# Altium PCB OmniSensor.PcbDoc
Units mm, origin at the board's own origin, x right, y up, seen from the top; angles counter-clockwise.
Board outline 70.1 x 50.04 mm, 4 copper layers (Top Layer, GND, PWR, Bottom Layer), stack 1.56 mm thick; 27 components, 11 nets, 95 pads, 19 vias.
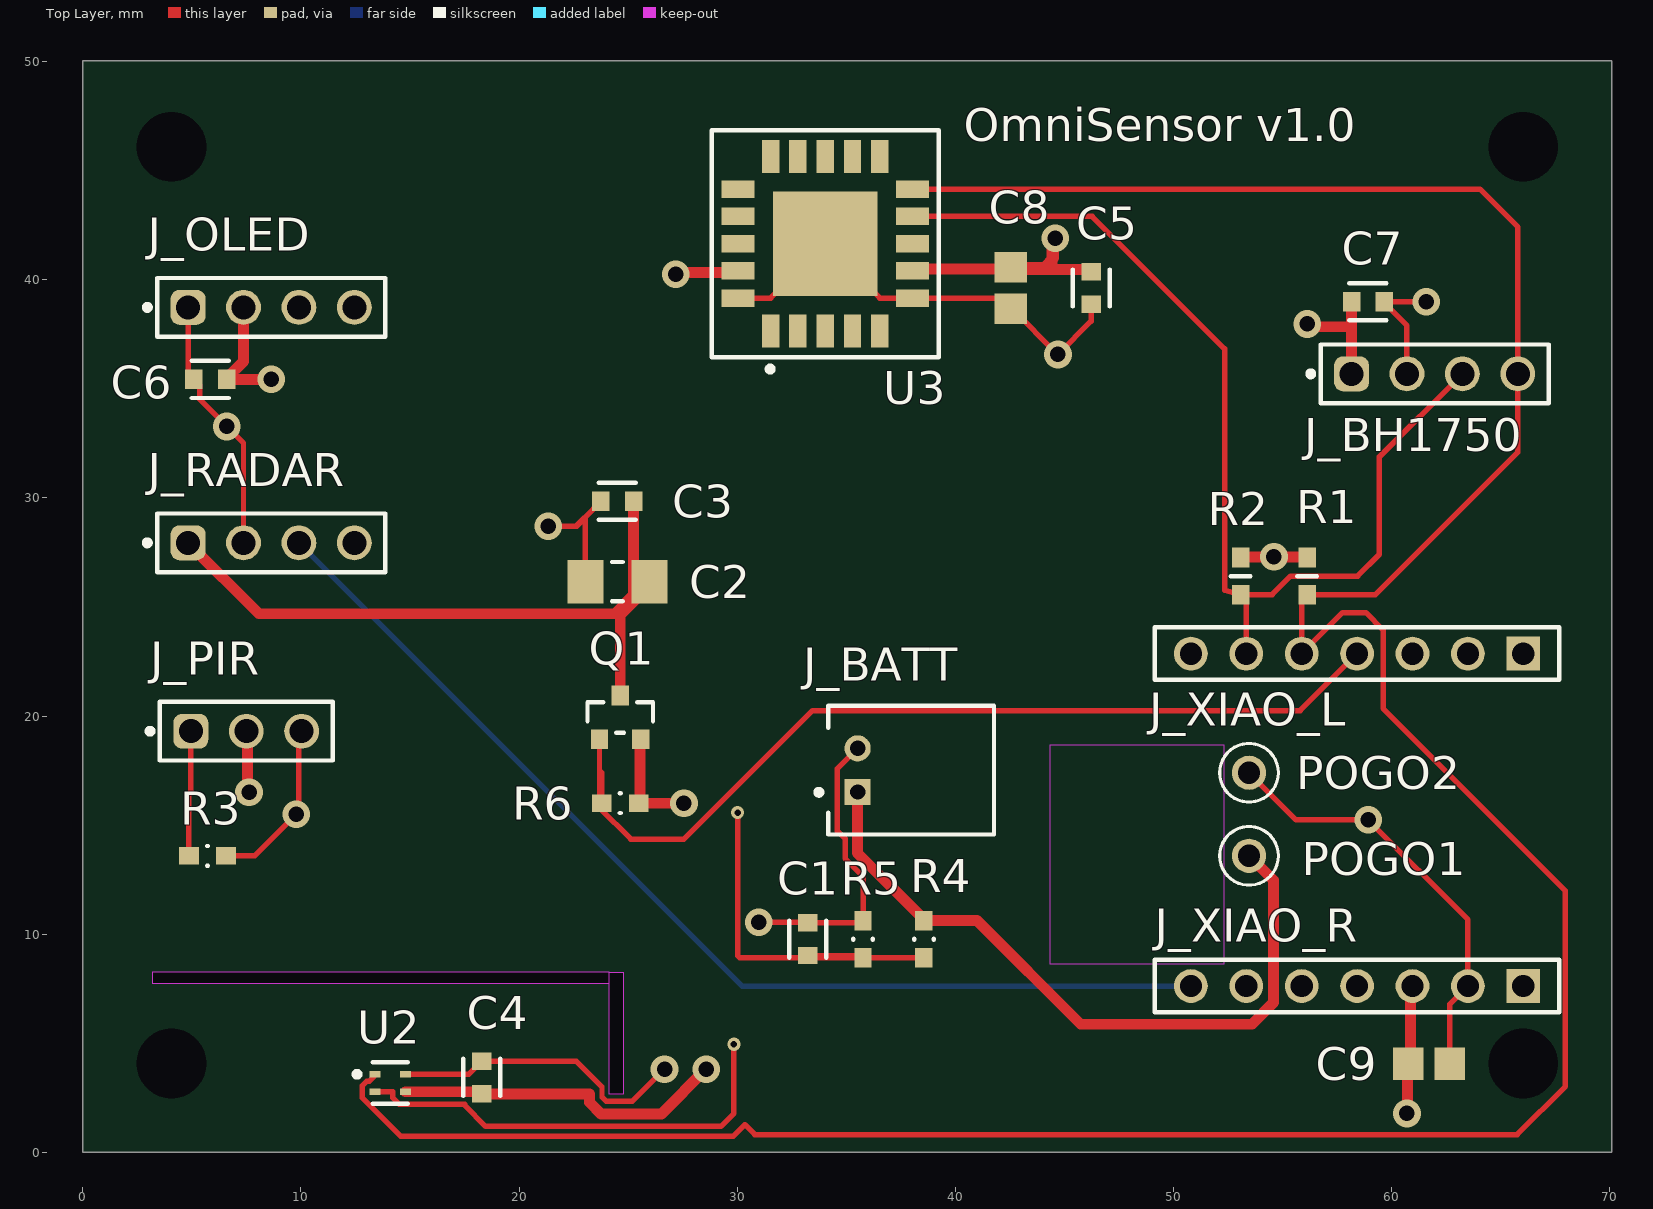
[diagram p0: Top Layer view]
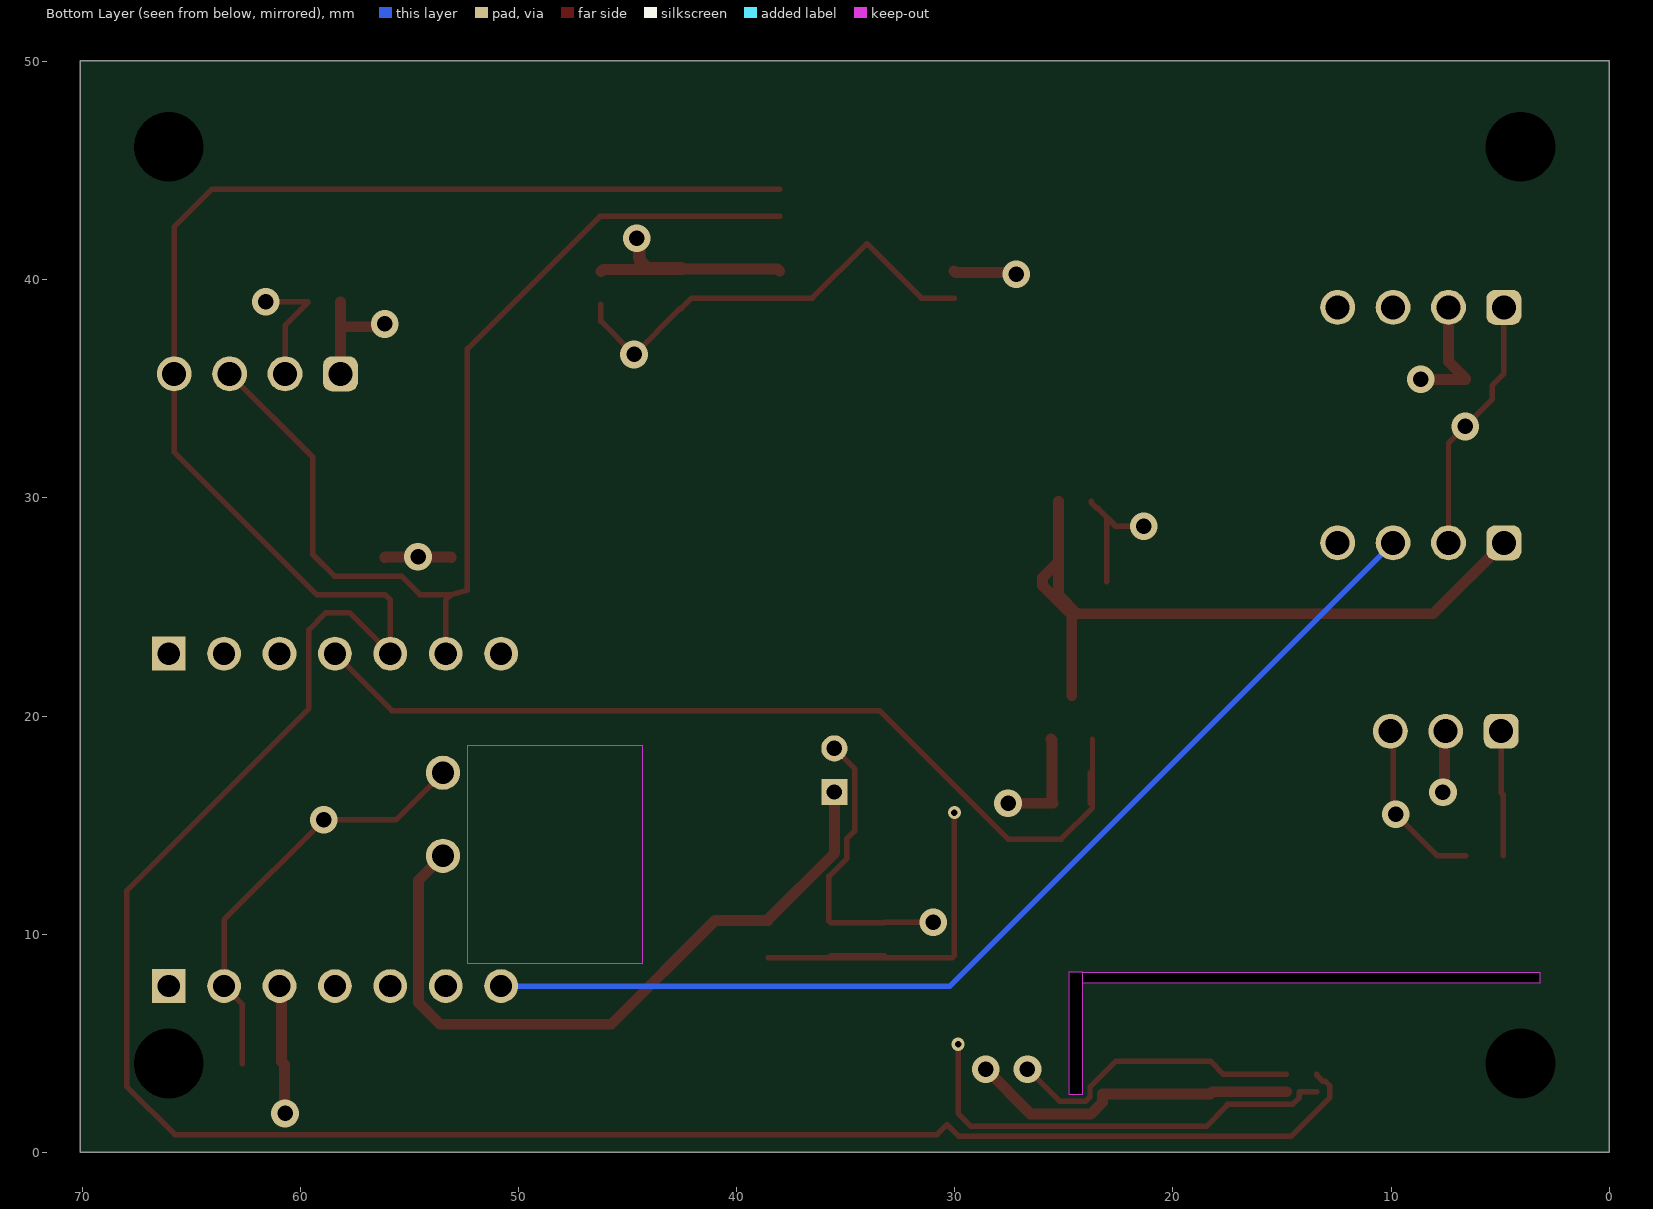
[diagram p1: Bottom Layer view, seen from below]
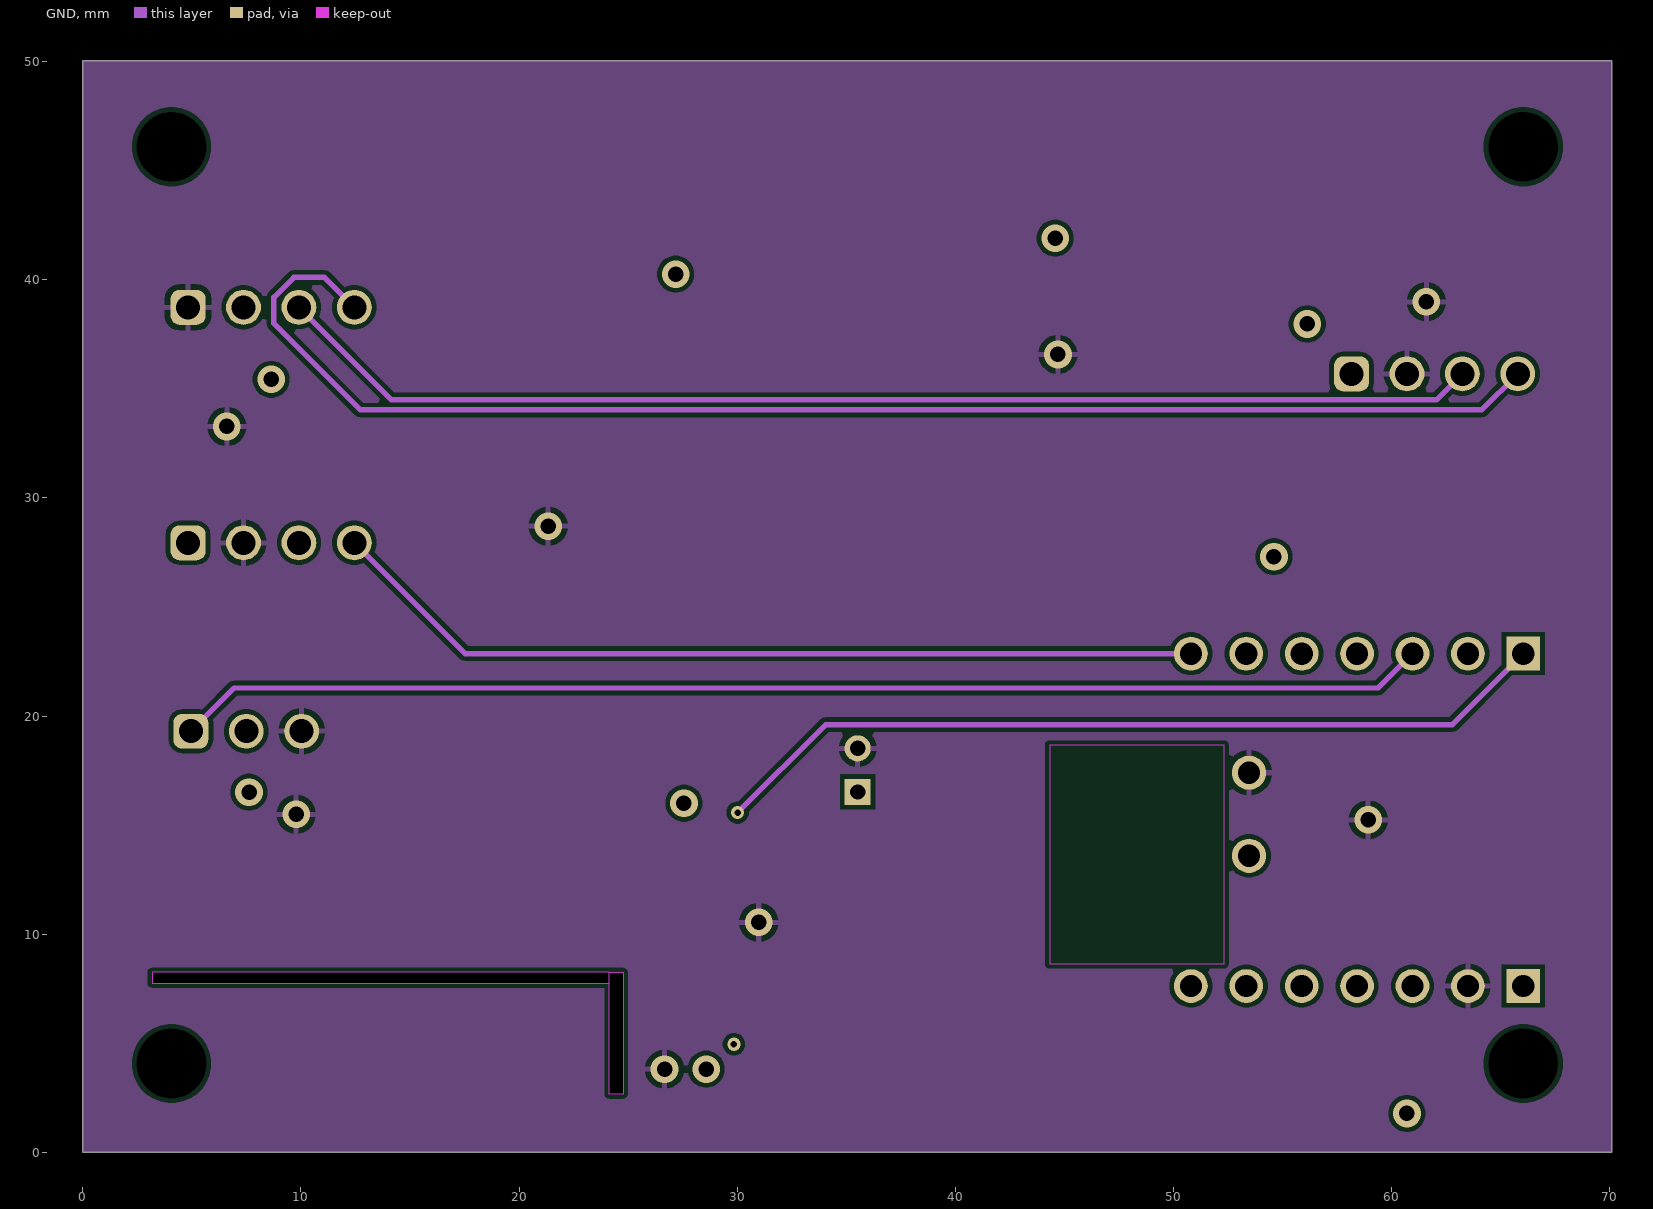
[diagram p2: GND]
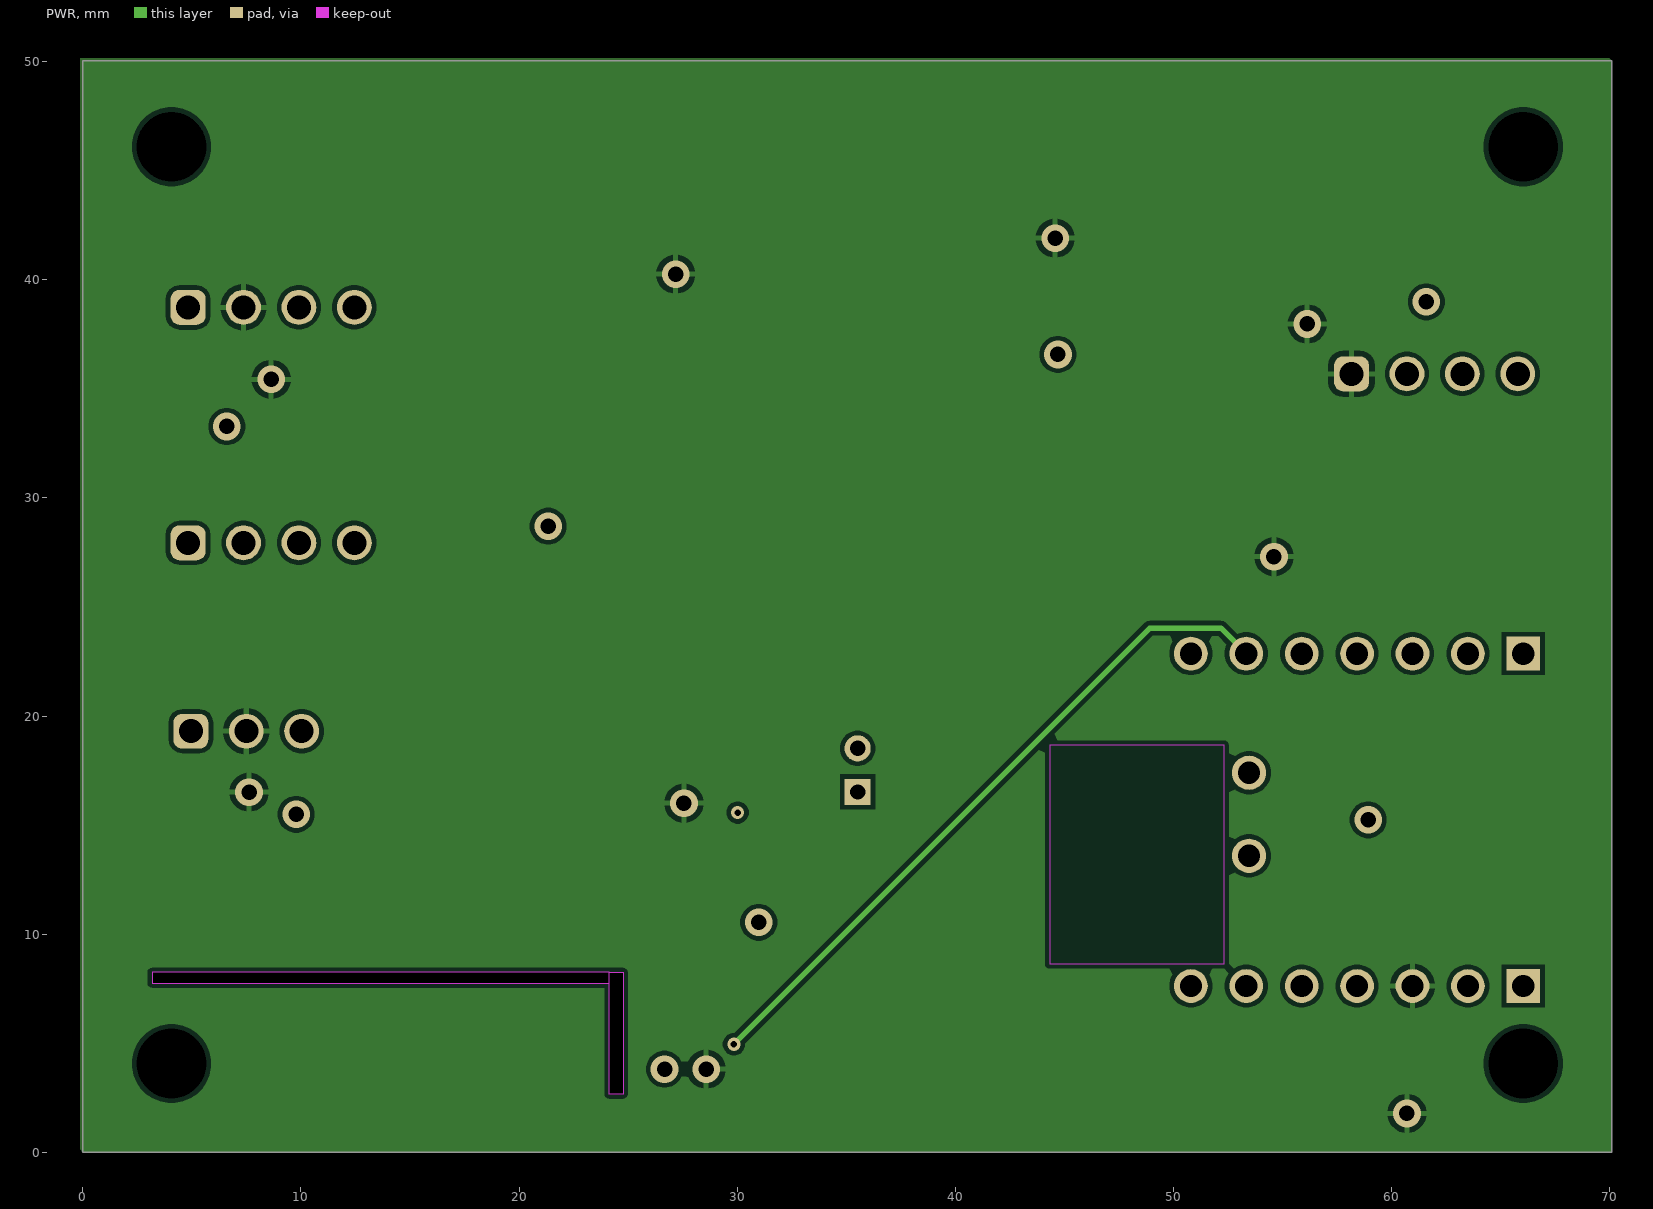
[diagram p3: PWR]
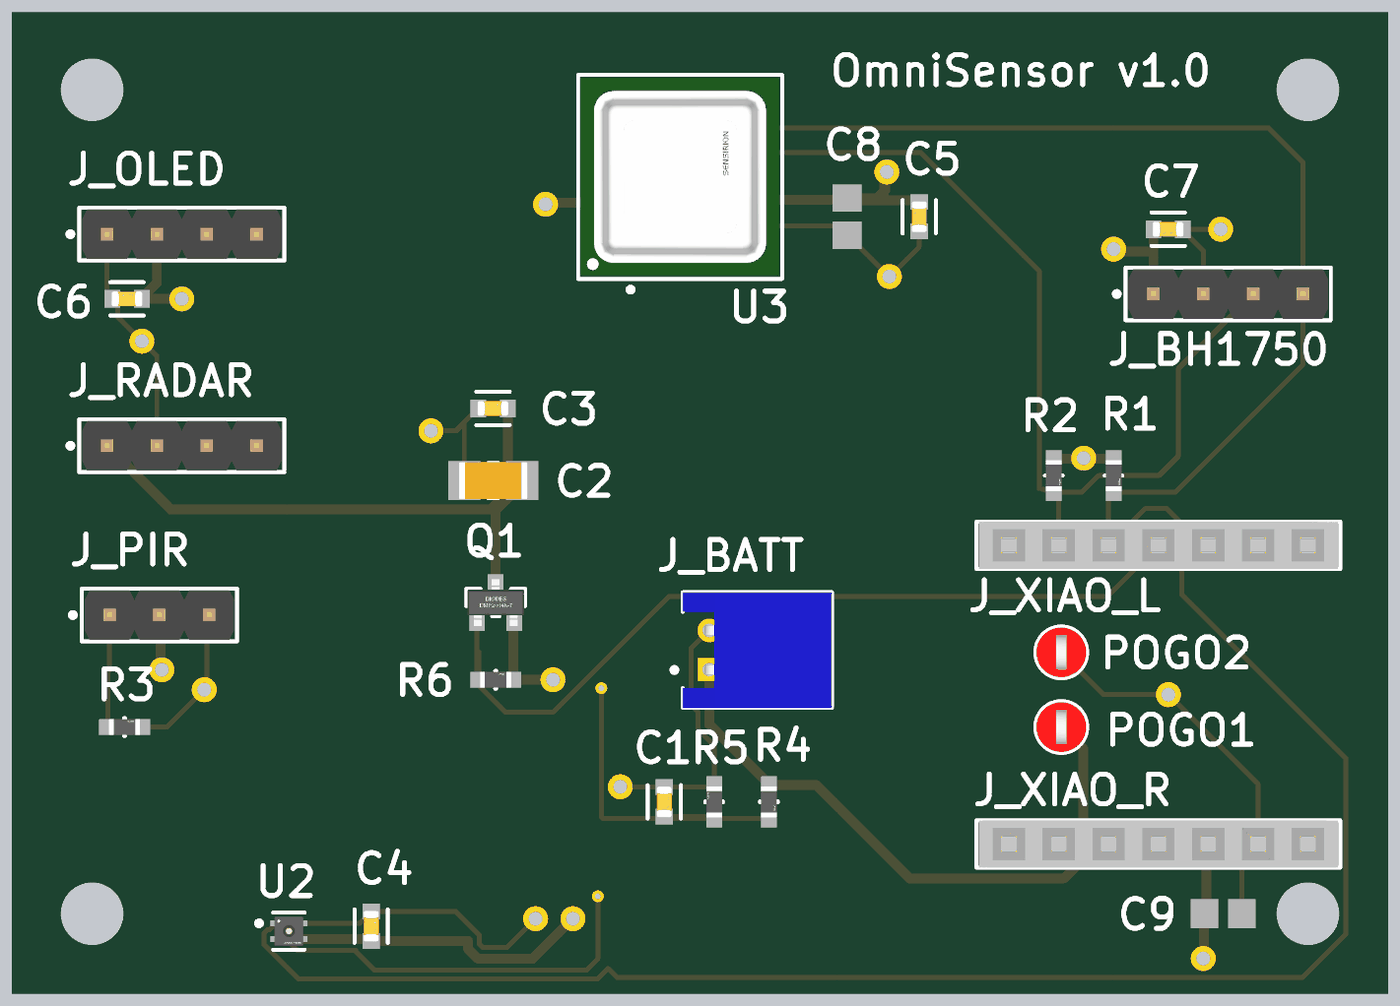
[diagram p4: 3D render of the assembled board from above, using the file's embedded part models]

## Layer stack, top to bottom
Top Solder: solder mask 0.01, Solder Resist, Dk 3.5
Top Layer: signal copper 0.035
Dielectric 2: prepreg 0.21, PP-006, Dk 4.1
GND: signal copper 0.035
Dielectric 1: dielectric 1, FR-4, Dk 4.8
PWR: signal copper 0.035
Dielectric 3: prepreg 0.21, PP-006, Dk 4.1
Bottom Layer: signal copper 0.035
Bottom Solder: solder mask 0.01, Solder Resist, Dk 3.5

## Board outline
0,0 0,50.038 70.104,50.038 70.104,0
cut-out: 24.13,8.255 24.765,8.255 24.765,2.667 24.13,2.667 24.13,7.747
cut-out: 3.175,7.747 24.13,7.747 24.13,8.255 3.175,8.255

## Design rules (kind name [scope] priority, off if disabled: settings)
Clearance [All] p1: gap=0.203 ignorepadtopadclearanceinfootprint=FALSE
HoleSize [All] p1: absolutevalues=TRUE maxlimit=4 minlimit=0.025 maxpercent=80.000 minpercent=20.000
PolygonConnect [All] p1: connectstyle=Relief reliefconductorwidth=0.254 reliefentries=4 polygonreliefangle="90 Angle" airgapwidth=0.254
RoutingVias [All] p1: holewidth=0.3 width=0.6 viastyle="Through Hole" minholewidth=0.3 minwidth=0.6 maxholewidth=0.3 maxwidth=0.6
SolderMaskExpansion [All] p1: expansion=0 istentingtop=FALSE
SupplyNets "Schematic Supply Nets_3" [InNet('+3V3_SW')] p1: voltage=0.000
SupplyNets "Schematic Supply Nets_2" [InNet('GND')] p2: voltage=0.000
SupplyNets "Schematic Supply Nets_1" [InNet('VBAT')] p3: voltage=0.000
SupplyNets "Schematic Supply Nets" [InNet('+3V3_AO')] p4: voltage=0.000
Width Width_Power [InNet('+3V3_AO') OR InNet('+3V3_SW') OR InNet('VBAT')] p1: maxlimit=1 minlimit=0.3 preferedwidth=0.5
Width [All] p2: maxlimit=0.5 minlimit=0.2 preferedwidth=0.25
29 further rules are at their usual default settings.

## Components (designator, comment, footprint, x,y, rotation, side; value= is the part's Value field where it differs from the comment)
C1 "CC0603KRX7R9BB104" FP-CC0603-DA-MFG 33.229,9.771 r90 top value="100 nF"
C2 "GRM31CR60J107ME39L" CAPC3216X190X55ML30T25 24.511,26.162 r0 top
C3 "CC0603KRX7R9BB104" FP-CC0603-DA-MFG 24.499,29.845 r180 top value="100 nF"
C4 "CC0603KRX7R9BB104" FP-CC0603-DA-MFG 18.288,3.429 r90 top value="100 nF"
C5 "CC0603KRX7R9BB104" FP-CC0603-DA-MFG 46.228,39.624 r270 top value="100 nF"
C6 "CC0603KRX7R9BB104" FP-CC0603-DA-MFG 5.842,35.433 r180 top value="100 nF"
C7 "CC0603KRX7R9BB104" FP-CC0603-DA-MFG 58.916,38.989 r0 top value="100 nF"
C8 "GRM21BR61A106KE19L" MURA-0805_H_1.35_M 42.545,39.624 r90 top
C9 "GRM21BR61A106KE19L" MURA-0805_H_1.35_M 61.722,4.064 r0 top
J_BATT "S2B-PH-K-S(LF)(SN)" JST-S2B-PH-K-S_V 37.973,17.518 r90 top
J_BH1750 "61300411121" 61300411121 61.976,35.687 r0 top
J_OLED "61300411121" 61300411121 8.636,38.735 r0 top
J_PIR "61300311121" 61300311121 7.493,19.304 r0 top
J_RADAR "61300411121" 61300411121 8.636,27.94 r0 top
J_XIAO_L "SSQ-107-01-T-S" SMTC-SSQ-107-01-X-S 66.04,22.86 r180 top
J_XIAO_R "SSQ-107-01-T-S" SMTC-SSQ-107-01-X-S 66.04,7.62 r180 top
POGO1 "5000" FP-5000-MFG 53.467,13.589 r90 top
POGO2 "5000" FP-5000-MFG 53.467,17.399 r90 top
Q1 "DMP2004K" FP-SOT23-MFG 24.638,19.939 r90 top
R1 "RC0603FR-073K3L" FP-RC0603-0_55-MFG 56.134,26.416 r270 top
R2 "RC0603FR-073K3L" FP-RC0603-0_55-MFG 53.086,26.416 r270 top
R3 "RC0603FR-07100KL" FP-RC0603-0_55-MFG 5.715,13.589 r0 top
R4 "RC0603FR-07100KL" FP-RC0603-0_55-MFG 38.563,9.771 r270 top
R5 "RC0603FR-07100KL" FP-RC0603-0_55-MFG 35.769,9.771 r90 top
R6 "RC0603FR-07100KL" FP-RC0603-0_55-MFG 24.638,16.002 r0 top
U2 "SHT40-AD1B-R2" FP-SHT40-AD1B-R2-MFG 14.097,3.175 r0 top
U3 "SCD41-D-R1" FP-SCD41-D-R1-MFG 34.036,41.656 r90 top

## Footprints (in the part's own frame and the unit in brackets; to place one, negate y for a bottom-side part, rotate by r counter-clockwise, add the part's x,y. Pads: shape width x height; smd on the part's side, far side on the other; paste and mask are expansions set on the pad)
61300311121 [mm] "Pin Header, pitch 2.54 mm, THT, Vertical, single row, 3p"
  rrect50% 1.6x1.6 hole 1.1: 1(-2.54,0)
  round 1.6 hole 1.1: 2(0,0) 3(2.54,0)
  silkscreen extent -4.53,-1.34 3.96,1.34, body extent -3.81,-1.27 3.81,1.27, height 8.57
61300411121 [mm] "Pin Header, pitch 2.54 mm, THT, Vertical, single row, 4p"
  rrect50% 1.6x1.6 hole 1.1: 1(-3.81,0)
  round 1.6 hole 1.1: 2(-1.27,0) 3(1.27,0) 4(3.81,0)
  silkscreen extent -5.8,-1.34 5.23,1.34, body extent -5.08,-1.27 5.08,1.27, height 8.57
CAPC3216X190X55ML30T25 [mm] "Chip Capacitor, 2-Leads, Body 3.5x1.9mm, IPC Low Density"
  rect 1.65x2 smd: 1(-1.475,0) 2(1.475,0)
  silkscreen extent -0.25,-0.9 0.25,0.9, body extent -1.75,-0.95 1.75,0.95, height 1.9
FP-5000-MFG [mm]
  round 1.57 hole 1.02 paste-2539.97 mask+0: 1(0,0)
  silkscreen extent -1.34,-1.35 1.34,1.35, body extent -1.45,-1.45 1.45,1.45, height 0.25
FP-CC0603-DA-MFG [mm]
  rect 0.8x0.9 smd paste+0 mask+0: 1(-0.75,0) 2(0.75,0)
  silkscreen extent -0.85,-0.85 0.85,0.85, body extent -0.8,-0.4 0.8,0.4, height 0.9
FP-RC0603-0_55-MFG [mm]
  rect 0.9x0.8 smd paste+0 mask+0: 1(-0.85,0) 2(0.85,0)
  silkscreen extent 0,-0.45 0,0.45, body extent -1.4,-0.55 1.4,0.55, height 0.25
FP-SCD41-D-R1-MFG [mm]
  rect 1.5x0.8 smd paste-1000 mask+0: 1(-4,2.5) 2(-4,1.25) 3(-4,0) 4(-4,-1.25) 5(-4,-2.5) 11(4,-2.5) 12(4,-1.25) 13(4,0) 14(4,1.25) 15(4,2.5)
  rect 0.8x1.5 smd paste-1000 mask+0: 6(-2.5,-4) 7(-1.25,-4) 8(0,-4) 9(1.25,-4) 10(2.5,-4) 16(2.5,4) 17(1.25,4) 18(0,4) 19(-1.25,4) 20(-2.5,4)
  rect 4.8x4.8 smd paste-1000 mask+0: 21(0,0)
  silkscreen extent -5.87,-5.2 5.2,5.2, body extent -5.3,-5.3 5.3,5.3, height 0.25
FP-SHT40-AD1B-R2-MFG [mm]
  rect 0.5x0.3 smd paste+0 mask+0: 1(-0.7,0.4) 2(-0.7,-0.4) 3(0.7,-0.4) 4(0.7,0.4)
  silkscreen extent -1.65,-0.95 0.8,0.95, body extent -1.05,-0.9 1.05,0.9, height 0.25
FP-SOT23-MFG [mm]
  rect 0.9x0.8 smd paste+0 mask+0: 1(-1,0.95) 2(-1,-0.95) 3(1,0)
  silkscreen extent -0.7,-1.5 0.7,1.5, body extent -1.2,-1.45 1.2,1.45, height 1.11
JST-S2B-PH-K-S_V [mm] "THD, 2-Leads, Body 7.6x5.9mm, Pitch 2mm"
  rect 1.2x1.2 hole 0.7: 1(-1,2.45)
  round 1.2 hole 0.7: 2(1,2.45)
  silkscreen extent -2.95,-3.8 2.95,4.35, body extent -2.95,-3.8 2.95,3.8, height 4.8
MURA-0805_H_1.35_M [mm] "SMD, 2-Leads, Body 2.1x1.35mm, IPC Low Density"
  rect 1.4x1.5 smd: 1(-0.95,0) 2(0.95,0)
  body extent -1.05,-0.67 1.05,0.67, height 1.35
SMTC-SSQ-107-01-X-S [mm] "SQ Post Socket, 1x7 Pins, Vertical, 2.54mm Pitch, Female"
  rect 1.55x1.55 hole 1.02: 1(0,0)
  round 1.55 hole 1.02: 2(2.54,0) 3(5.08,0) 4(7.62,0) 5(10.16,0) 6(12.7,0) 7(15.24,0)
  silkscreen extent -1.65,-1.2 16.89,1.2, body extent -1.52,-1.21 16.76,1.21, height 8.51

## Part data
C1 C3 C4 C5 C6 C7: library part CMP-2100-03601-2, "CAP CER 0.1UF 50V X7R 0603", Capacitance="100 nF", Manufacturer=YAGEO, Package=CC0603-DA, Temperature="-55°C to +125°C", Temperature Characteristic=X7R, Temperature Coefficient=15%, Temperature Range High=+125°C, Temperature Range Low=-55°C, Tolerance=0.1, Voltage="50 V", Automotive=No, Category=Cap, ComponentLink2Description=Datasheet, ComponentLink2URL=http://www.yageo.com/documents/recent/UPY-GPHC_X7R_6.3V-to-50V_18.pdf, Device Class L1="Passive Components", Device Class L2=Capacitors, Device Class L3="Ceramic Capacitors", Digikey Description="CAP CER 0.1UF 50V X7R 0603", Footprint Url=http://www.yageo.com/exep/pages/download/literatures/UPY-C_GEN_24.pdf, Height=0.9mm, Lead Free=Yes, Manufacturer Part Number=CC0603KRX7R9BB104, Material=Ceramic, Mouser Description="Multilayer Ceramic Capacitor, CC Series, 0.1 - F, - 10%, X7R, 50 V, 0603 [1608 Metric]", Octopart=https://octopart.com/cc0603krx7r9bb104-yageo-42244635, RoHS=TRUE, Voltage Rating="50 V"
C2: library part CMP-1662-00011-2, "Chip Capacitor, 100 uF, +/- 20%, 6.3 V, -55 to 85 degC, 1206 (3216 Metric), RoHS, Tape and Reel", Capacitance="100 uF", Case Code (Imperial)=1206, Case Code (Metric)=3216, Max Operating Temperature="85 degC", Min Operating Temperature="-55 degC", Package Quantity=2000, Tolerance=20%, Type (Capacitors)=X5R, Voltage Rating="6.3 V", Case\/Package=1206, ComponentLink1Description="Manufacturer URL", ComponentLink1URL=http://www.murata.com/, ComponentLink2Description=Datasheet, ComponentLink2URL=http://psearch.en.murata.com/capacitor/product/GRM31CR60J107ME39%23.pdf, DatasheetVersion=09/2016, Height="1.6 mm", Length="3.2 mm", Mount="Surface Mount", Mounting Technology="Surface Mount", PackageDescription="2-Pin Surface Mount Device, Body 3.2 x 1.6 mm", PackageReference=1206, Packaging="Tape and Reel", PartNumber=GRM31CR60J107ME39L, Pins=2, Radiation Hardening=No, REACH SVHC="No SVHC", RoHSCompliant=true, Voltage Rating (DC)="6.3 V", Width="1.6 mm"
C8 C9: library part CMP-2000-05254-1, "CAP, Ceramic, 10 uF, 10%, 10 V, 0805, RoHS, Tape and Reel", Capacitance=10µF, Manufacturer=Murata, Operating Temperature=-55degC~85degC, Package / Case=0805(2012Metric), Package Description="2-Pin Surface Mount Device (0805), Body 2.1 x 1.35 mm", Package Reference=805, Ratings=-, Standard Package=1, Temperature Coefficient=X5R, Tolerance=±10%, Voltage - Rated=10V, Applications=GeneralPurpose, Catalog Drawings=GRMSeries_0805_1.25, Category=Capacitors, Datasheet URL=https://datasheet.ciiva.com/3777/210grm21br61a106ke1923-3777175.pdf, Datasheet Version=Aug-14, Family=CeramicCapacitors, Featured Product=GA3SafetyRecognizedCapsandHi-CapMLCC, Features=-, Height - Seated (Max)=-, Lead Spacing=-, Lead Style=-, Manufacturer URL=http://www.murata.com/, Mounting Type=SurfaceMount,MLCC, Online Catalog=GRMSeries, Other Names=490-1709-6, Packaging=Digi-Reel, Product Training Modules=High-CapMultilayerCeramicCapacitors, Series=GRM, Size / Dimension="0.079\"Lx0.049\"W(2.00mmx1.25mm)", Thickness (Max)="0.053\"(1.35mm)"
J_BATT: library part CMP-1755-00004-1, "Male Header, Pitch 2 mm, 1 x 2 Position, Height 4.8 mm, Tail Length 3.4 mm, -25 to 85 degC, RoHS, Bulk", Capacitance="10 uF", Case\Package=Radial, Max Operating Temperature="85 degC", Min Operating Temperature="-40 degC", Package Quantity=200, Tolerance=20%, Voltage Rating="50 V", ComponentLink1Description=Datasheet, ComponentLink1URL=http://www.jst-mfg.com/product/pdf/eng/ePH.pdf, DatasheetVersion=Dec-12, Diameter="5 mm", Height="11 mm", Lead Pitch="2 mm", Length="11 mm", Mount="Through Hole", PackageDescription="Male Header, Pitch 2 mm, 1 x 2 Position, Height 4.8 mm, Tail Length 3.4 mm", PackageReference=S2B-PH-K-S, Packaging=Bulk, Pins=2, Radiation Hardening=No, REACH SVHC="No SVHC", RoHSCompliant=true, Voltage Rating (DC)="50 V"
J_BH1750 J_OLED J_RADAR: library part CMP-1502-01064-4, "THT Vertical Pin Header WR-PHD, Pitch 2.54 mm, Single Row, 4 pins", Color=Black, Contact Resistance=20mΩ, Current Rating=3A, Max Operating Temperature=105°C, Min Operating Temperature=-40°C, Operating Supply Voltage=250V, Connector Type="Male Pin", Contact Material=Gold, Contact Mating Length=5.9944mm, Contact Plating=Gold, Gender=Male, Height=8.89mm, Lead Free="Lead Free", Lead Pitch=2.54mm, Mount="Through Hole", Number of Contacts=4, Number of Pins=4, Number of Positions=4, Number of Rows=1, Orientation=Vertical, Packaging=Bulk, Pitch=2.54mm, RoHS=Compliant, Termination=Solder, Voltage Rating=250V
J_PIR: library part CMP-1502-01062-4, "THT Vertical Pin Header WR-PHD, Pitch 2.54 mm, Single Row, 3 pins", Color=Black, Contact Resistance=20mΩ, Current Rating=3A, Max Operating Temperature=105°C, Min Operating Temperature=-40°C, Operating Supply Voltage=250V, Connector Type="Male Pin", Contact Material=Gold, Contact Mating Length=5.9944mm, Contact Plating=Gold, Gender=Male, Height=8.94mm, Lead Free="Lead Free", Lead Pitch=2.54mm, Mount="Through Hole", Number of Contacts=3, Number of Pins=3, Number of Positions=3, Number of Rows=1, Orientation=Vertical, Packaging=Bulk, Pitch=2.54mm, RoHS=Compliant, Termination=Solder, Voltage Rating=250V
J_XIAO_L J_XIAO_R: library part CMP-1023-00285-1, "SQ Post Socket, Through-hole, Vertical, -55 to 105 degC, 2.54 mm Pitch, 7-Pin, Female, RoHS", Manufacturer=Samtec, Temperature Range="-55 to 105 degC", ComponentLink1Description="Manufacturer URL", ComponentLink1URL=http://www.samtec.com, ComponentLink2Description=Datasheet, ComponentLink2URL=http://www.samtec.com/documents/webfiles/pdf/SSQ_TH.PDF, ComponentLink3Description="Package Specification", ComponentLink3URL=http://www.samtec.com/documents/webfiles/cpdf/SSQ-1XX-XX-XXX-X-XX-XXX-XX-X-MKT.pdf, DatasheetVersion=F-214, Mounting Technology=Through-hole, Orientation=Vertical, PackageDescription="Assembly, Socket Strip .025[0.64] SQ Tail", PackageReference=SSQ-107-01-X-S, PackageVersion="BD, 6/1987", PartNumber=SSQ-107-01-T-S, Pitch="2.54 mm", RoHS=True
POGO1 POGO2: library part CMP-19636-000027-1, "PC TEST POINT MINIATURE RED", Color=Red, Flammability Rating="UL94 V-0", Package Quantity=100, Body Material=Bronze, Contact Material=Bronze, Contact Plating=Tin, Height=0.3inch, Hole Diameter=1.6mm, Housing Color=Red, Inside Diameter=1.27mm, Insulation=Insulated, Lead Free="Lead Free", Length=7.62mm, Material=Nylon, Mount=PCB, Number of Contacts=1, Number of Ports=1, Orientation=Straight, Outside Diameter=2.54mm, Packaging=Bulk, Plating=Silver, REACH SVHC="No SVHC", RoHS Compliant=Yes, Series=THM
Q1: library part CMP-12801-000029-1, "MOSFET P-CH 20V 600MA SOT23-3", Continuous Drain Current=-600mA, Drain To Source Breakdown Voltage=-20V, Drain To Source Resistance=1.1Ω, Gate To Source Voltage=8V, Input Capacitace At Vds="175pF @ -16V", Manufacturer="Diodes Inc.", Manufacturer Part Number=DMP2004K-7, Max Forward Diode Voltage=-1.2V, Max Junction Temp=+150°C, Package=SOT23, Power Dissipation=550mW, Pulse Drain Current=-1.9A, Temperature="-55°C to +150°C", Temperature Range Low=-55°C, Automotive=No, Category=Trans, ComponentLink2Description=Datasheet, ComponentLink2URL=https://www.diodes.com/assets/Datasheets/ds30933.pdf, Depletion Mode=False, Device Class L1="Discrete Semiconductors", Device Class L2=Transistors, Device Class L3=MOSFETs, Digikey Description="MOSFET P-CH 20V 600MA SOT23-3", Drain To Source Voltage=-20V, Footprint Url=https://www.diodes.com/assets/Package-Files/SOT23.pdf, Height=1.1mm, Lead Free=Yes, Mouser Description="MOSFET P-Channel", Number Of Channels=1, Number Of P Channels=1, Octopart=https://octopart.com/dmp2004k-7-diodes+inc.-7151877, RoHS=TRUE, Rthja Max=227°C/W, Standoff Height=0.013mm, Temperature Range High=+150°C, Threshold Vgs Max=-1V, Threshold Vgs Min=-0.5V, Turn Off Delay Time=20.2ns, Turn On Delay Time=8.5ns
R1 R2: library part CMP-1012-00567-3, Case Code (Imperial)=0603, Max Operating Temperature=155°C, Max Power Dissipation=100mW, Min Operating Temperature=-55°C, Resistance=3.3kΩ, Temperature Coefficient=100ppm/°C, Tolerance=1%, Voltage Rating=50V, Case Code (Metric)=0603, Case/Package=0603, Composition="Thick Film", Depth=800µm, Features="Moisture Resistant", Height=450µm, Lead Free="Lead Free", Length=1.6mm, Military Standard=Not, Mount="Surface Mount", NexarPartId=40011875, Number of Pins=2, Number of Terminations=2, Packaging="Tape & Reel", Power Rating=100mW, REACH SVHC="No SVHC", RoHS=Compliant, Schedule B="8533210045, 8533210045", Termination=SMD/SMT, Voltage Rating (AC)=50V, Voltage Rating (DC)=50V, Width=800µm
R3 R4 R5 R6: library part CMP-2100-03662-2, "RES SMD 100K OHM 1% 1/10W 0603", Case Code (Imperial)=0603, Case Code (Metric)=1608, Max Operating Temperature=155°C, Max Power Dissipation=100mW, Min Operating Temperature=-55°C, Resistance=100kΩ, Resistance Tolerance=1%, Resistor Type="Thick Film", Temperature Coefficient=100ppm/°C, Voltage Rating=50V, Working Voltage=75V, Case/Package=0603, Construction=Rectangular, Depth=0.8mm, Features="Moisture Resistant", Height=0.45mm, Lead Free="Lead Free", Length=1.6mm, Military Standard=Not, Number of Pins=2, Number of Terminations=2, Packaging="Tape and Reel", Power Rating=100mW, REACH SVHC="No SVHC", RoHS Compliant=Yes, Series=RC, Technology="THICK FILM", Termination=SMD/SMT, Tolerance=1%, Voltage Rating (DC)=50V, Width=0.8mm
U2: library part CMP-144040-000008-1, "SENSOR HUMIDITY 100 RH SMD"
U3: library part CMP-144026-000007-1, "CO2 SENSOR 40 PPM I2C SMD"

## Free pads (board coordinates)
  round 1.524 hole 3.2 unplated: MH1(4.064,4.064) MH2(66.04,4.064) MH3(66.04,46.101) MH4(4.064,46.101)

## Via types
v1: diameter 1.27, hole 0.711, Top Layer to Bottom Layer, 17 vias
v2: diameter 0.6, hole 0.3, Top Layer to Bottom Layer, 2 vias

## Nets (pads, with @x,y where several pads share a name; then routed paths per layer and width w, separated by ;. In a path a pad name is that pad's centre, name@x,y a point inside that pad or via, vN(x,y) a via of type N, cw(c..) or ccw(c..) an arc to the next point about the centre after c; other vN are vias at no path point)
+3V3_AO: C4.1 C5.1 C6.1 C7.1 C8.2 C9.1 J_BH1750.1 J_OLED.2 J_PIR.2 J_XIAO_R.3 Q1.2 R1.1 R2.1 R6.2 U2.3 U3.7 U3.19 | length 59
  Top Layer w0.5: C6.1 v1(8.636,35.433) ; C6.1@6.592,35.483 7.366,36.257 J_OLED.2 ; J_PIR.2 7.556,19.241 7.556,16.573 v1(7.62,16.51) ; U2.3 18.192,2.775 C4.1 23.224,2.679 23.224,2.292 23.755,1.761 26.526,1.761 v1(28.575,3.81) ; Q1.2 25.538,18.889 25.538,16.052 R6.2 v1(27.559,16.002) ; v1(27.178,40.259) 27.252,40.333 29.963,40.333 U3.19 ; U3.7 38.12,40.49 42.461,40.49 42.477,40.474 44.303,40.474 ; C8.2 44.079,40.574 44.501,40.996 44.501,41.834 v1(44.577,41.91) 44.43,41.763 44.43,40.601 44.303,40.474 ; C5.1 46.128,40.474 44.303,40.474 ; R2.1 53.106,27.285 54.59,27.285 v1(54.61,27.305) 54.63,27.285 56.114,27.285 R1.1 ; v1(56.134,37.973) 56.261,37.846 58.166,37.846 ; J_BH1750.1 58.166,37.846 ; C7.1 58.166,37.846 ; v1(60.706,1.778) 60.739,1.811 60.739,4.031 C9.1 60.866,4.158 60.866,7.526 J_XIAO_R.3
+3V3_SW: C2.2 C3.1 J_RADAR.1 Q1.3 | length 33.4
  Top Layer w0.5: J_RADAR.1 8.076,24.69 24.387,24.69 25.249,25.552 C2.2@25.249,27.074 ; Q1.3 24.638,24.639 25.986,25.987 C2.2 25.986,26.337 C2.2@25.249,27.074 ; C3.1 C2.2@25.249,27.074
BATT_SENSE: C1.1 J_XIAO_L.1 R4.2 R5.1 | length 56.8
  Top Layer w0.25: v2(30.023,15.57) 30.023,9.017 30.119,8.921 R5.1 ; C1.1 35.669,9.021 R5.1 ; R4.2 R5.1
  GND w0.25: v2(30.023,15.57) 34.061,19.609 62.789,19.609 J_XIAO_L.1
GND: C1.2 C2.1 C3.2 C4.2 C5.2 C6.2 C7.2 C8.1 C9.2 J_BATT.2 J_BH1750.2 J_OLED.1 J_PIR.3 J_RADAR.2 J_XIAO_R.2 POGO2.1 R3.2 R5.2 U2.4 U3.6 U3.20 U3.21 | length 99.7
  Top Layer w0.25: J_OLED.1 4.826,35.699 C6.2 5.367,35.158 5.367,34.511 v1(6.604,33.274) 7.366,32.512 J_RADAR.2 ; R3.2 7.874,13.589 v1(9.779,15.494) 9.906,15.621 9.906,19.177 J_PIR.3 ; U2.4 17.684,3.575 C4.2 22.618,4.179 23.802,2.995 23.802,2.531 23.994,2.339 25.199,2.339 v1(26.67,3.81) ; v1(21.336,28.702) 22.606,28.702 ; C2.1 23.036,29.082 22.656,28.702 22.606,28.702 ; C3.2 23.749,29.795 23.474,29.52 23.424,29.52 22.606,28.702 ; U3.20 31.536,39.156 U3.21 36.536,39.156 U3.6 42.063,39.156 C8.1 42.595,38.674 44.693,36.576 v1(44.704,36.576) 46.228,38.1 C5.2 ; v1(30.988,10.541) 33.209,10.541 C1.2 35.669,10.521 R5.2 35.769,12.647 34.945,13.472 34.945,14.377 34.595,14.727 34.595,17.59 J_BATT.2 ; POGO2.1 55.626,15.24 v1(58.928,15.24) 63.5,10.668 J_XIAO_R.2 62.672,6.792 C9.2 ; C7.2@59.666,38.939 60.706,37.899 J_BH1750.2 ; C7.2 v1(61.595,38.989)
I2C_SCL: J_BH1750.3 J_OLED.3 J_XIAO_L.6 R2.2 U2.2 U3.9 | length 156.6
  Top Layer w0.25: U2.2 14.219,2.775 14.219,2.489 14.511,2.197 17.51,2.197 17.51,2.143 18.47,1.182 29.249,1.182 29.845,1.778 v2(29.845,4.953) ; U3.9 46.273,42.906 52.349,36.83 52.349,25.769 R2.2 ; J_XIAO_L.6 53.34,25.312 R2.2 ; J_BH1750.3 59.436,31.877 59.436,27.407 58.445,26.416 55.372,26.416 54.522,25.566 R2.2
  GND w0.25: J_OLED.3 14.148,34.493 62.052,34.493 J_BH1750.3
  PWR w0.25: v2(29.845,4.953) 48.92,24.028 52.172,24.028 J_XIAO_L.6
I2C_SDA: J_BH1750.4 J_OLED.4 J_XIAO_L.5 R1.2 U2.1 U3.10 | length 207
  Top Layer w0.25: U2.1 13.397,3.525 13.125,3.253 13.011,3.253 12.819,3.061 12.819,2.489 14.579,0.729 29.812,0.729 30.353,1.27 30.81,0.813 65.761,0.813 67.97,3.023 67.97,11.989 59.614,20.345 59.614,23.952 58.826,24.74 57.76,24.74 J_XIAO_L.5 55.88,25.312 R1.2 59.258,25.566 65.786,32.094 J_BH1750.4 65.786,42.418 64.048,44.156 U3.10
  GND w0.25: J_OLED.4 11.074,40.107 9.677,40.107 8.763,39.192 8.763,37.998 12.725,34.036 64.135,34.036 J_BH1750.4
PIR_OUT: J_PIR.1 J_XIAO_L.3 R3.1 | length 63.2
  Top Layer w0.25: R3.1 4.865,16.383 4.953,16.471 J_PIR.1
  GND w0.25: J_PIR.1 6.934,21.285 59.385,21.285 J_XIAO_L.3
RADAR_RX: J_RADAR.3 J_XIAO_R.7 | length 49.3
  Bottom Layer w0.25: J_RADAR.3 30.226,7.62 J_XIAO_R.7
RADAR_TX: J_RADAR.4 J_XIAO_L.7 | length 40.5
  GND w0.25: J_RADAR.4 17.526,22.86 J_XIAO_L.7
RAIL_EN: J_XIAO_L.4 Q1.1 R6.1 | length 43.5
  Top Layer w0.25: Q1.1 23.688,17.499 ; R6.1 23.788,17.399 23.688,17.499 ; J_XIAO_L.4 55.804,20.244 33.452,20.244 27.559,14.351 25.121,14.351 23.688,15.784 23.688,17.499
VBAT: J_BATT.1 POGO1.1 R4.1 | length 32.8
  Top Layer w0.5: J_BATT.1 35.523,13.711 38.563,10.671 R4.1 40.996,10.621 45.749,5.867 53.594,5.867 54.585,6.858 54.585,12.471 POGO1.1
pads on no net: J_XIAO_L.2 J_XIAO_R.1 J_XIAO_R.4 J_XIAO_R.5 J_XIAO_R.6 U3.1 U3.2 U3.3 U3.4 U3.5 U3.8 U3.11 U3.12 U3.13 U3.14 U3.15 U3.16 U3.17 U3.18

## Polygon pours and split planes (outlines as drawn)
GND on GND "GND_L02_P000" (solid, pour order 0): 0,0 70.104,0 70.104,50.038 0,50.038
+3V3_AO on PWR "+3V3_AO_L03_P001" (solid, pour order 1): 0,0 -0.127,0.127 -0.127,50.165 69.977,50.165 70.104,50.038 70.104,0

## Keep-outs
Keep-Out Layer:
  rectangle: 44.323,8.636 52.324,18.669

## Silkscreen, mask and mechanical layers (free items; w line width, h text height)
Top Overlay:
  text "OmniSensor v1.0" at 40.386,46.355 h1.52